# Altium PCB PCB-15_19.PcbDoc (part 3 of 4)
Units mm, origin at the board's own origin, x right, y up, seen from the top; angles counter-clockwise.
Board outline 190 x 150 mm, 6 copper layers (Top Layer, Mid-Layer 1, VCC3V3, GND, Mid-Layer 2, Bottom Layer), stack 1.173 mm thick; 129 components, 396 nets, 1206 pads, 565 vias.
Unrouted connection lines stored in the file: 15.
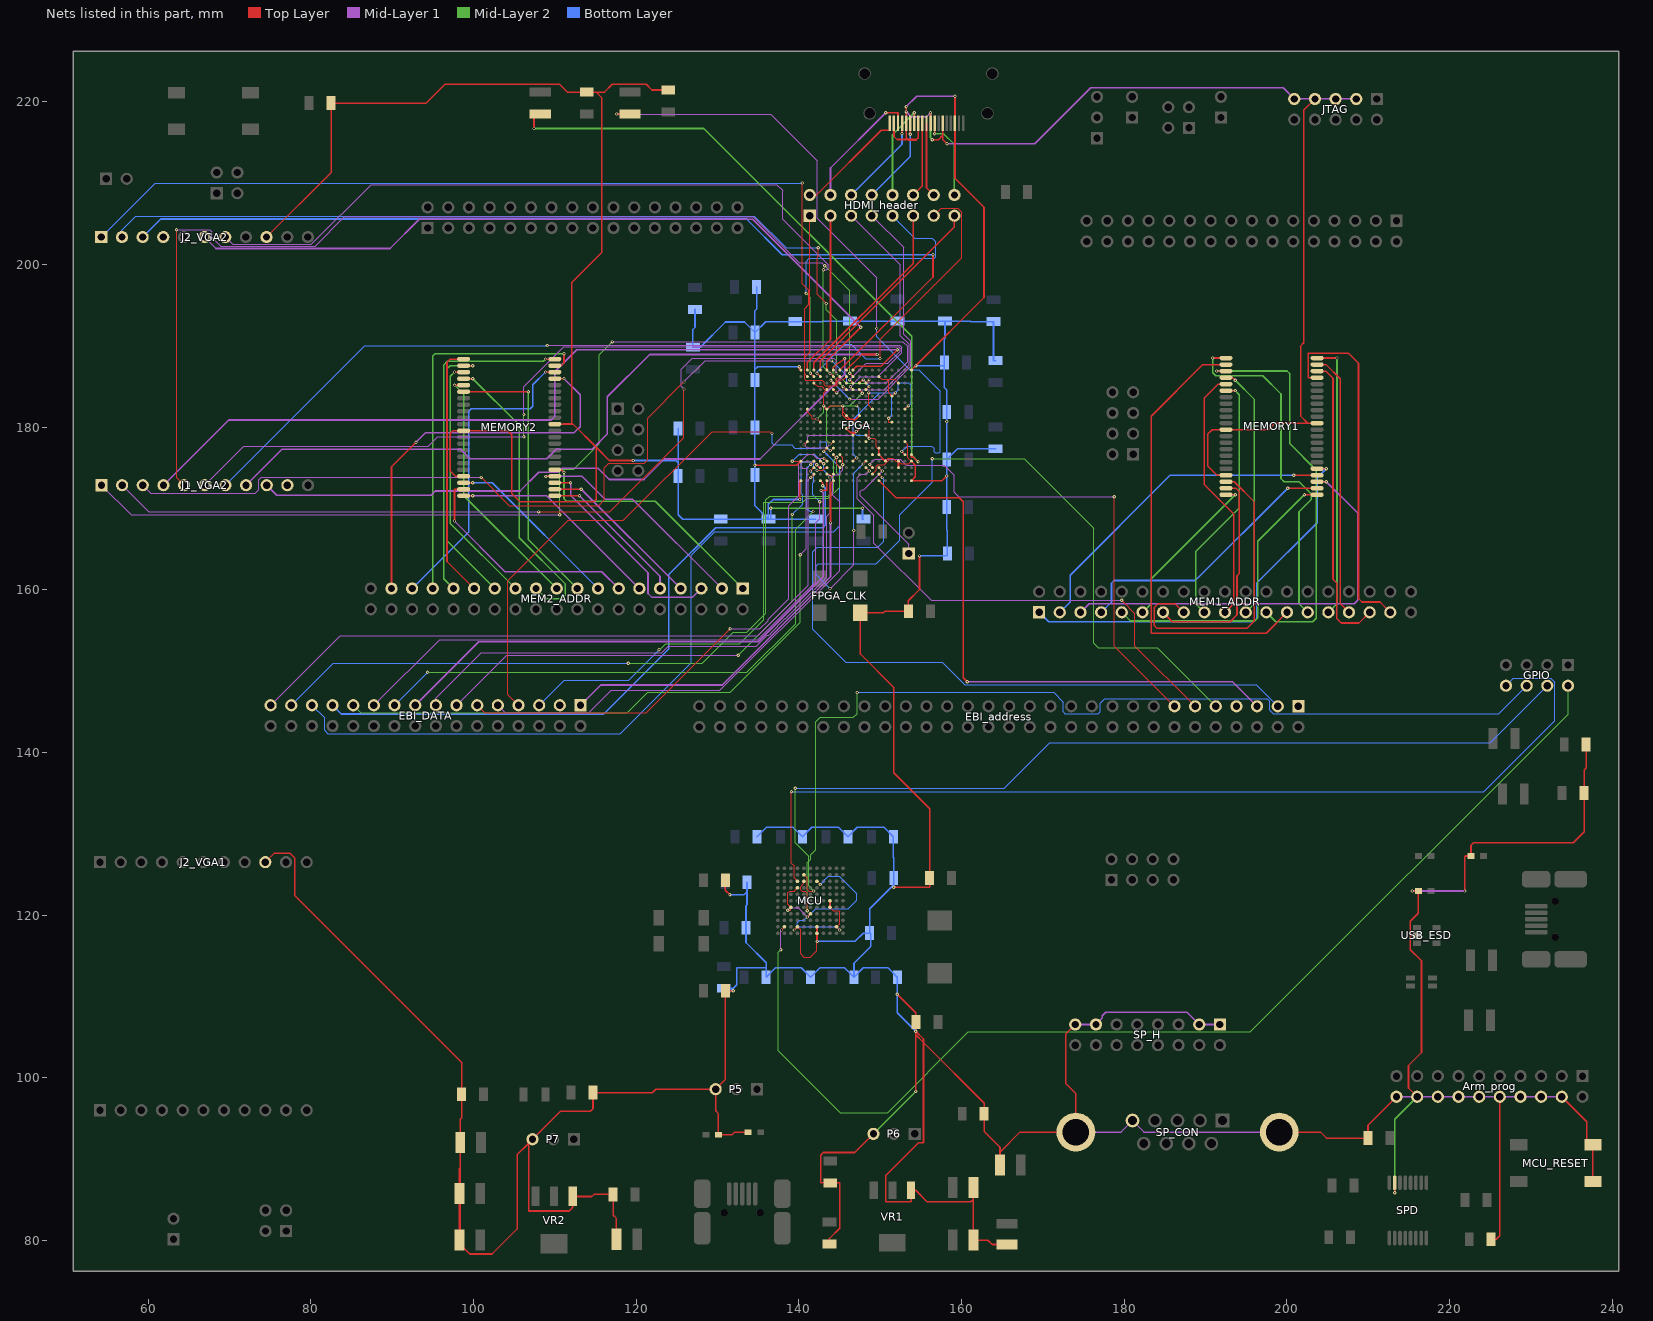
[diagram p7: the nets of this part, all layers, seen from the top]

## Via types
v1: diameter 0.4, hole 0.2, Top Layer to Bottom Layer, 548 vias
v2: diameter 0.4, hole 0.25, Top Layer to Bottom Layer, tented top, 9 vias
v3: diameter 7, hole 5, Top Layer to Bottom Layer, 4 vias
v4: diameter 1.3, hole 0.9, Top Layer to Bottom Layer, 3 vias
v5: diameter 1.5, hole 1.1, Top Layer to Bottom Layer, 1 vias

## Nets (pads, with @x,y where several pads share a name; then routed paths per layer and width w, separated by ;. In a path a pad name is that pad's centre, name@x,y a point inside that pad or via, vN(x,y) a via of type N, cw(c..) or ccw(c..) an arc to the next point about the centre after c; other vN are vias at no path point) (continued)
FPGA.A23: EBI_address.13 FPGA.T12 | length 62.8
  Top Layer w0.1: v1(148.717,175.412) 148.717,175.337 FPGA.T12@149.047,175.007 ; v1(178.791,171.425) 178.791,153.06 EBI_address.13@186.182,145.669
  Mid-Layer 1 w0.1: v1(148.717,175.412) 149.329,176.025 152.473,176.025 153.214,175.284 157.889,175.284 159.118,174.056 159.118,171.968 159.662,171.425 v1(178.791,171.425)
FPGA.A24: EBI_address.11 FPGA.T11 | length 61.4
  Top Layer w0.1: FPGA.T11@148.247,175.007 v1(148.648,174.606) ; v1(179.705,158.699) 181.331,157.074 181.331,153.06 EBI_address.11@188.722,145.669
  Mid-Layer 1 w0.1: v1(148.648,174.606) 148.234,174.193 147.625,174.193 147.18,173.748 147.18,171.19 149.216,169.154 149.216,165.744 156.261,158.699 v1(179.705,158.699)
FPGA.A25: EBI_address.9 FPGA.R11 | length 100
  Top Layer w0.1: v1(147.903,175.463) FPGA.R11@148.247,175.807
  Mid-Layer 1 w0.1: v1(143.84,160.147) 146.761,163.068 v1(146.761,167.284)
  Mid-Layer 2 w0.1: v1(156.413,176.098) 167.742,176.098 176.251,167.589 176.251,153.416 176.784,152.883 184.048,152.883 EBI_address.9@191.262,145.669
  Bottom Layer w0.1: v1(143.84,160.147) 142.138,161.849 142.138,162.966 142.367,163.195 149.53,163.195 152.425,166.091 152.425,169.24 156.413,173.228 v1(156.413,176.098) ; v1(146.761,167.284) 146.761,174.321 v1(147.903,175.463)
FPGA.AD00: EBI_DATA.31 FPGA.U3 | length 86.3
  Top Layer w0.1: v1(141.453,173.812) 141.656,174.015 141.847,174.015 FPGA.U3@141.847,174.207
  Mid-Layer 1 w0.1: EBI_DATA.31@75.057,145.796 83.591,154.33 134.924,154.33 141.173,160.579 141.173,173.533 v1(141.453,173.812)
FPGA.AD01: EBI_DATA.29 FPGA.P6 | length 90.5
  Top Layer w0.1: FPGA.P6@144.247,176.607 v1(144.602,176.251)
  Mid-Layer 2 w0.1: v1(119.024,150.952) 128.118,150.952 131.928,154.762 133.582,154.762 135.941,157.121 135.941,171.044 136.423,171.526 143.637,171.526 144.272,172.161 144.272,175.92 v1(144.602,176.251)
  Bottom Layer w0.1: EBI_DATA.29@77.597,145.796 82.753,150.952 v1(119.024,150.952)
FPGA.AD02: EBI_DATA.27 FPGA.N5 | length 96.1
  Top Layer w0.1: v1(143.053,177.013) FPGA.N5@143.447,177.407
  Bottom Layer w0.1: EBI_DATA.27@80.137,145.796 81.686,144.247 81.686,142.697 82.093,142.291 118.034,142.291 126.746,151.003 126.746,164.264 129.64,167.157 144.323,167.157 145.009,167.843 145.009,175.057 v1(143.053,177.013)
FPGA.AD03: EBI_DATA.25 FPGA.V4 | length 81.7
  Top Layer w0.2: FPGA.V4@142.647,173.407 142.929,173.125 v1(142.929,172.798)
  Bottom Layer w0.2: EBI_DATA.25@82.677,145.796 83.744,144.729 116.014,144.729 124.003,152.718 124.003,161.874 129.769,167.64 142.939,167.64 143.256,167.957 143.256,172.471 v1(142.929,172.798)
FPGA.AD04: EBI_DATA.23 FPGA.T4 | length 83.3
  Top Layer w0.1: v1(142.215,175.362) 142.443,175.133 142.443,175.007 FPGA.T4@142.647,175.007
  Mid-Layer 1 w0.1: v1(140.183,164.313) 140.894,165.024 140.894,173.558 141.046,173.711 141.046,174.899 140.995,174.95 140.493,174.95 140.284,175.158 140.284,175.565 140.487,175.768 141.808,175.768 v1(142.215,175.362)
  Mid-Layer 2 w0.1: EBI_DATA.23@85.217,145.796 86.131,144.882 118.923,144.882 121.437,147.396 131.547,147.396 140.183,156.032 v1(140.183,164.313)
FPGA.AD05: EBI_DATA.21 FPGA.T3 | length 75.6
  Top Layer w0.1: v1(141.427,174.6) 141.44,174.6 FPGA.T3@141.847,175.007
  Mid-Layer 1 w0.1: EBI_DATA.21@87.757,145.796 95.834,153.873 134.927,153.873 142.062,161.009 142.062,168.224 142.57,168.732 v1(142.57,170.815)
  Bottom Layer w0.1: v1(141.427,174.6) 141.808,174.219 141.808,173.228 141.707,173.126 141.707,171.679 v1(142.57,170.815)
FPGA.AD06: EBI_DATA.19 FPGA.R3 | length 75.2
  Top Layer w0.1: v1(141.453,175.412) 141.656,175.616 FPGA.R3@141.847,175.807
  Mid-Layer 2 w0.1: v1(94.361,149.86) 133.608,149.86 139.598,155.851 139.598,167.462 v1(141.757,169.621)
  Bottom Layer w0.1: EBI_DATA.19@90.297,145.796 v1(94.361,149.86) ; v1(141.453,175.412) 140.995,174.955 140.995,169.977 141.351,169.621 v1(141.757,169.621)
FPGA.AD07: EBI_DATA.17 FPGA.V5 | length 69.3
  Top Layer w0.2: v1(142.723,172.212) 143.422,172.212 143.447,172.237 FPGA.V5@143.447,173.407
  Mid-Layer 1 w0.2: EBI_DATA.17@92.837,145.796 100.635,153.594 135.001,153.594 143.002,161.595 143.002,171.933 v1(142.723,172.212)
FPGA.AD08: EBI_DATA.15 FPGA.U5 | length 68.4
  Top Layer w0.1: FPGA.U5@143.447,174.207 143.84,174.207 v1(143.84,173.736)
  Mid-Layer 1 w0.1: EBI_DATA.15@95.377,145.796 95.377,146.685 100.965,152.273 123.165,152.273 123.927,153.035 134.796,153.035 136.142,154.381 136.324,154.381 136.522,154.579 136.522,154.635 138.3,156.413 138.356,156.413 138.554,156.611 138.554,156.667 140.332,158.445 140.388,158.445 143.459,161.517 143.459,169.062 143.84,169.443 v1(143.84,173.736)
FPGA.AD09: EBI_DATA.13 FPGA.T5 | length 68.3
  Top Layer w0.1: v1(142.24,174.677) 142.926,174.677 143.256,175.007 FPGA.T5@143.447,175.007
  Mid-Layer 1 w0.1: EBI_DATA.13@97.917,145.796 104.064,151.943 v1(132.563,151.943)
  Mid-Layer 2 w0.1: v1(132.563,151.943) 139.192,158.572 v1(139.192,169.266)
  Bottom Layer w0.1: v1(139.192,169.266) 140.462,170.536 140.462,171.653 140.284,171.831 140.284,175.565 140.487,175.768 141.681,175.768 141.841,175.608 141.841,175.076 v1(142.24,174.677)
FPGA.AD10: EBI_DATA.11 FPGA.R5 | length 66
  Top Layer w0.1: EBI_DATA.11@100.457,145.796 101.371,144.882 121.234,144.882 v1(131.547,155.194) ; v1(143.105,176.149) FPGA.R5@143.447,175.807
  Mid-Layer 1 w0.1: v1(131.547,155.194) 135.222,155.194 136.22,156.191 136.22,156.364 138.735,158.879 138.735,170.307 139.979,171.552 139.979,175.543 141.094,176.657 141.707,176.657 142.215,176.149 v1(143.105,176.149)
FPGA.AD11: EBI_DATA.9 FPGA.P7 | length 65.1
  Top Layer w0.1: FPGA.P7@145.047,176.607 145.415,176.239 v1(145.415,175.362)
  Mid-Layer 1 w0.1: EBI_DATA.9@102.997,145.796 103.911,144.882 114.148,144.882 116.916,147.65 130.3,147.65 145.009,162.359 145.009,170.815 144.196,171.628 144.196,173.939 144.424,174.168 144.831,174.168 145.415,174.752 v1(145.415,175.362)
FPGA.AD12: EBI_DATA.7 FPGA.N6 | length 66.5
  Top Layer w0.1: EBI_DATA.7@105.537,145.796 104.242,147.091 104.242,161.138 111.633,168.529 118.44,168.529 129.337,179.426 136.5,179.426 v1(136.703,179.222) ; v1(143.866,177.114) 143.954,177.114 FPGA.N6@144.247,177.407
  Bottom Layer w0.1: v1(136.703,179.222) 136.703,178.003 136.906,177.8 139.116,177.8 139.497,177.419 142.494,177.419 142.646,177.571 142.646,178.125 142.697,178.175 143.256,178.175 143.459,177.972 143.459,177.521 v1(143.866,177.114)
FPGA.AD13: EBI_DATA.5 FPGA.T7 | length 61.7
  Top Layer w0.1: v1(144.653,176.276) 144.653,175.401 FPGA.T7@145.047,175.007
  Mid-Layer 2 w0.1: v1(122.809,152.629) 122.885,152.629 123.647,153.391 132.766,153.391 135.687,156.312 135.687,170.713 135.712,170.739 140.462,170.739 140.945,171.221 143.612,171.221 145.003,172.613 145.003,174.041 144.653,174.391 v1(144.653,176.276)
  Bottom Layer w0.1: EBI_DATA.5@108.077,145.796 111.176,148.895 119.075,148.895 v1(122.809,152.629)
FPGA.AD14: EBI_DATA.3 FPGA.R7
FPGA.AD15: EBI_DATA.1 FPGA.V6 | length 49.2
  Top Layer w0.2: v1(143.887,168.22) 143.887,173.047 FPGA.V6@144.247,173.407
  Mid-Layer 1 w0.2: EBI_DATA.1@113.157,145.796 115.646,148.285 130.581,148.285 143.887,161.591 v1(143.887,168.22)
FPGA.CLK_SIG: CLK_JMP.1 FPGA.T13 | length 14.4
  Top Layer w0.1: FPGA.T13@149.847,175.007 150.254,174.6 v1(150.266,174.6)
  Mid-Layer 1 w0.1: v1(150.266,174.6) 147.98,172.314 147.783,172.314 147.58,172.11 147.58,171.559 153.524,165.615 CLK_JMP.1@153.524,164.459
FPGA.CS0: EBI_address.5 FPGA.V13 | length 70.6
  Top Layer w0.2: FPGA.V13@149.847,173.407 151.944,171.31 159.715,171.31 160.223,170.802 160.223,149.187 v1(160.719,148.692)
  Mid-Layer 1 w0.2: v1(160.719,148.692) 193.319,148.692 EBI_address.5@196.342,145.669
FPGA.CS1: EBI_address.7 FPGA.M11
FPGA.REN: EBI_address.1 FPGA.P12
FPGA.WEN: EBI_address.3 FPGA.U13 | length 88.4
  Top Layer w0.1: FPGA.U13@149.847,174.207 v1(150.241,173.813)
  Bottom Layer w0.1: v1(150.241,173.813) 150.464,173.59 150.464,165.983 149.682,165.202 142.24,165.202 141.732,164.694 141.732,155.118 145.765,151.085 157.627,151.085 160.376,148.336 196.215,148.336 EBI_address.3@198.882,145.669
FPGA_LEDS.LED_1: FPGA.P17 R3.1 | length 77.5
  Top Layer w0.1: v1(152.654,177) FPGA.P17@153.047,176.607
  Top Layer w0.2: v1(117.626,218.487) R3.1@119.253,218.487
  Mid-Layer 1 w0.1: v1(117.626,218.487) 136.525,218.487 142.265,212.747 142.265,205.664 149.56,198.369 v1(149.56,192.121)
  Bottom Layer w0.1: v1(149.56,192.121) 149.56,191.105 153.619,187.046 154.762,187.046 157.404,184.404 157.404,176.987 157.282,176.866 156.769,176.866 156.647,176.987 156.647,177.391 156.366,177.673 153.327,177.673 v1(152.654,177)
FPGA_LEDS.LED_2: FPGA.P18 R4.1 | length 76.6
  Top Layer w0.2: v1(107.442,216.713) 107.442,218.487 R4.1@108.204,218.487 ; FPGA.P18@153.847,176.607 153.847,176.327 153.872,176.301 154.102,176.301 v1(154.661,175.743)
  Mid-Layer 2 w0.2: v1(107.442,216.713) 128.321,216.713 153.873,191.16 153.873,176.53 v1(154.661,175.743)
FPGA_VGA-I/O.J1_P2: FPGA.A6 J1_VGA2.9 | length 82.9
  Top Layer w0.2: FPGA.A6@144.247,187.007 144.247,187.325 144.627,187.705 v1(145.657,188.417)
  Mid-Layer 1 w0.2: J1_VGA2.9@74.58,172.86 75.812,171.628 94.793,171.628 95.301,172.136 105.715,172.136 108.026,174.447 110.41,174.447 110.897,174.935 115.311,174.935 116.688,173.558 120.968,173.558 123.482,176.073 135.23,176.073 145.657,186.5 v1(145.657,188.417)
FPGA_VGA-I/O.J1_P3: FPGA.C7 J1_VGA2.10
FPGA_VGA-I/O.J1_P8: FPGA.A8 J1_VGA2.8 | length 92.4
  Top Layer w0.2: FPGA.A8@145.847,187.007 147.765,188.925 v1(149.631,188.925)
  Mid-Layer 1 w0.2: J1_VGA2.8@72.04,172.86 76.447,177.267 98.425,177.267 99.568,176.124 109.017,176.124 110.185,177.292 114.605,177.292 116.459,179.146 116.459,183.718 121.666,188.925 v1(149.631,188.925)
FPGA_VGA-I/O.J1_P9: FPGA.D9 J1_VGA2.7 | length 99.6
  Top Layer w0.1: v1(146.355,184.963) 146.355,184.899 FPGA.D9@146.647,184.607
  Mid-Layer 1 w0.1: v1(109.068,190.017) 109.11,190.059 152.4,190.059 152.671,189.789 152.671,189.131 149.721,186.182 147.574,186.182 v1(146.355,184.963)
  Bottom Layer w0.1: J1_VGA2.7@69.5,172.86 86.657,190.017 v1(109.068,190.017)
FPGA_VGA-I/O.J1_P10: FPGA.C9 J1_VGA2.6 | length 104.8
  Top Layer w0.1: v1(146.253,185.801) FPGA.C9@146.647,185.407
  Mid-Layer 1 w0.1: J1_VGA2.6@66.96,172.86 71.773,177.673 94.437,177.673 95.58,178.816 v1(106.197,178.816) ; v1(106.197,181.559) 106.197,184.963 111.094,189.859 152.298,189.859 152.471,189.687 152.471,189.351 150.96,187.841 148.293,187.841 v1(146.253,185.801)
  Mid-Layer 2 w0.1: v1(106.197,178.816) v1(106.197,181.559)
FPGA_VGA-I/O.J1_P11: FPGA.B9 J1_VGA2.5 | length 131.7
  Top Layer w0.1: v1(63.5,204.267) 63.5,173.78 J1_VGA2.5@64.42,172.86 ; v1(146.253,186.614) 146.253,186.601 FPGA.B9@146.647,186.207
  Mid-Layer 1 w0.1: v1(63.5,204.267) 67.589,204.267 67.843,204.013 67.843,203.327 68.91,202.26 80.56,202.26 84.141,205.842 134.394,205.842 140.038,200.197 142.83,200.197 v1(143.18,199.847)
  Mid-Layer 2 w0.1: v1(143.18,199.847) 146.253,196.774 v1(146.253,186.614)
FPGA_VGA-I/O.J1_P12: FPGA.A9 J1_VGA2.4 | length 106.9
  Top Layer w0.2: FPGA.A9@146.647,187.007 147.127,187.487 150.098,187.487 v1(152.121,189.509)
  Mid-Layer 1 w0.2: J1_VGA2.4@61.88,172.86 69.893,180.873 109.563,180.873 109.982,181.292 109.982,186.792 112.7,189.509 v1(152.121,189.509)
FPGA_VGA-I/O.J1_P13: FPGA.D11 J1_VGA2.3 | length 107.6
  Top Layer w0.1: v1(100.94,173.812) 104.394,170.358 115.418,170.358 116.103,171.044 116.103,175.006 116.637,175.539 120.98,175.539 121.412,175.971 121.412,181.077 v1(125.882,185.547) ; FPGA.D11@148.247,184.607 v1(148.641,185.001)
  Mid-Layer 1 w0.1: J1_VGA2.3@59.34,172.86 60.318,171.882 73.177,171.882 73.609,172.314 73.609,173.533 73.889,173.812 v1(100.94,173.812) ; v1(125.882,185.547) 128.473,188.138 v1(144.069,188.138)
  Bottom Layer w0.1: v1(144.069,188.138) 145.872,186.334 145.872,185.598 146.101,185.369 148.272,185.369 v1(148.641,185.001)
FPGA_VGA-I/O.J1_P14: FPGA.C11 J1_VGA2.2 | length 109.4
  Top Layer w0.1: v1(108.026,169.57) 116.738,169.57 125.882,178.714 v1(125.882,184.683) ; FPGA.C11@148.247,185.407 148.438,185.598 v1(148.641,185.801)
  Mid-Layer 1 w0.1: J1_VGA2.2@56.8,172.86 60.09,169.57 v1(108.026,169.57) ; v1(125.882,184.683) 125.527,185.039 125.527,187.122 126.898,188.493 144.272,188.493 144.577,188.189 v1(144.577,186.639)
  Mid-Layer 2 w0.1: v1(144.577,186.639) 145.847,185.369 148.209,185.369 v1(148.641,185.801)
FPGA_VGA-I/O.J1_P15: FPGA.C10 J1_VGA2.1 | length 128.4
  Top Layer w0.1: FPGA.C10@147.447,185.407 147.841,185.801 v1(147.93,185.801)
  Mid-Layer 1 w0.1: J1_VGA2.1@54.26,172.86 57.905,169.215 v1(110.592,169.215) ; v1(117.069,190.475) 152.806,190.475 153.365,189.916 153.365,188.036 150.774,185.445 148.285,185.445 v1(147.93,185.801)
  Mid-Layer 2 w0.1: v1(110.592,169.215) 110.592,174.549 110.846,174.803 112.315,174.803 115.468,177.956 115.468,188.874 v1(117.069,190.475)
FPGA_VGA-I/O.J2_P0: FPGA.A5 J2_VGA2.6 | length 95.2
  Top Layer w0.2: FPGA.A5@143.447,187.007 143.447,188.13 v1(147.599,192.283)
  Mid-Layer 1 w0.2: J2_VGA2.6@66.94,203.36 68.345,201.955 89.738,201.955 93.32,205.537 134.345,205.537 v1(147.599,192.283)
FPGA_VGA-I/O.J2_P1: FPGA.B6 J2_VGA2.7 | length 98.5
  Top Layer w0.1: v1(143.84,186.614) 144.043,186.411 144.247,186.411 FPGA.B6@144.247,186.207
  Mid-Layer 1 w0.1: J2_VGA2.7@69.48,203.36 70.38,202.46 80.057,202.46 87.401,209.804 137.312,209.804 138.024,209.093 138.024,205.559 143.612,199.971 143.612,199.542 143.408,199.339 v1(143.027,199.339)
  Mid-Layer 2 w0.1: v1(143.027,199.339) 143.027,187.427 v1(143.84,186.614)
FPGA_VGA-I/O.J2_P4: FPGA.A7 J2_VGA2.3 | length 118.8
  Top Layer w0.2: FPGA.A7@145.047,187.007 156.489,198.449 v1(156.489,201.193)
  Bottom Layer w0.2: J2_VGA2.3@59.32,203.36 61.548,205.588 133.579,205.588 137.973,201.193 v1(156.489,201.193)
FPGA_VGA-I/O.J2_P5: FPGA.D8 J2_VGA2.2 | length 108.2
  Top Layer w0.1: v1(142.392,202.057) 142.392,200.99 142.24,200.838 142.24,196.342 v1(143.383,195.199) ; v1(145.44,184.963) 145.797,184.607 FPGA.D8@145.847,184.607
  Mid-Layer 2 w0.1: v1(143.383,195.199) 143.383,194.412 144.653,193.142 144.653,187.833 144.221,187.401 144.221,186.182 v1(145.44,184.963)
  Bottom Layer w0.1: J2_VGA2.2@56.78,203.36 56.78,204.227 58.496,205.943 134.544,205.943 138.43,202.057 v1(142.392,202.057)
FPGA_VGA-I/O.J2_P6: FPGA.C8 J2_VGA2.4
FPGA_VGA-I/O.J2_P7: FPGA.B8 J2_VGA2.1 | length 120.1
  Top Layer w0.1: v1(140.437,210.007) 140.437,197.606 141.249,196.794 141.249,195.095 140.717,194.562 140.717,185.852 140.819,185.75 142.888,185.75 143.117,185.522 143.117,185.203 143.256,185.064 144.704,185.064 144.704,185.623 144.882,185.801 145.441,185.801 FPGA.B8@145.847,186.207
  Bottom Layer w0.1: J2_VGA2.1@54.24,203.36 60.887,210.007 v1(140.437,210.007)
GND: ?.2 ?.5 ?.8 ?.11 ?.14 ?.17 Arm_prog.4 Arm_prog.6 Arm_prog.8 Arm_prog.10 Arm_prog.12 Arm_prog.14 Arm_prog.16 Arm_prog.18 Arm_prog.20 C1.2 C2.1 C3.1 C4.1 C5.1 C6.1 C7.1 C8.1 C9.1 C10.1 C11.1 C12.1 C13.1 C14.1 C15.1 C16.1 C17.1 C18.1 C19.1 C20.2 C21.1 C22.1 C23.1 C24.1 C25.2 C27.1 C28.1 C29.1 C30.1 C33.1 C35.1 C36.2 C37.2 C38.1 C39.1 C40.2 C41.2 C42.2 C43.1 C44.2 C45.2 C46.1 C47.1 C48.2 C49.2 C50.1 C51.1 C52.1 C53.1 C54.2 C55.2 C56.2 C57.1 C58.1 C59.2 C60.2 C61.1 D1.2 D2.2 D3.2 D4.2 D5.2 D6.2 FPGA.A1 FPGA.A18 FPGA.B7 FPGA.B13 FPGA.C3 FPGA.C16 FPGA.D5 FPGA.D10 FPGA.E15 FPGA.G2 FPGA.G5 FPGA.G12 FPGA.G17 FPGA.H8 FPGA.H10 FPGA.J4 FPGA.J9 FPGA.J11 FPGA.J15 FPGA.K8 FPGA.K10 FPGA.L9 FPGA.L11 FPGA.M2 FPGA.M6 FPGA.M17 FPGA.N13 FPGA.P13 FPGA.R1 FPGA.R4 FPGA.R9 FPGA.R14 FPGA.R16 FPGA.R18 FPGA.T16 FPGA.U6 FPGA.U12 FPGA.V1 FPGA.V18 FPGA_CLK.2 J2_VGA1.9 J2_VGA2.9 JTAG.3 JTAG.5 JTAG.7 JTAG.9 L3.1 L4.1 L5.1 L6.1 MCU.C7 MCU.D4 MCU.F9 MCU.G3 MCU.G9 MCU.H6 MCU.K4 MCU.K7 MCU.K10 MCU.L7 MCU_RESET.2 MCU_RESET.4 MEMORY1.12 MEMORY1.34 MEMORY1.41 MEMORY2.12 MEMORY2.34 MEMORY2.41 P5.3 P6.3 P7.3 R7.2 SP_CON.5 SP_CON.10 SP_CON.11 SP_H.1 SP_H.3 SP_H.13 SP_H.15 SPD.15 USB_ESD.2 VR1.1 VR2.1 | length 1345.4
  Top Layer w0.1: v1(138.633,120.599) 139.029,120.599 MCU.G3@139.029,120.954 138.629,121.354 138.629,122.733 138.858,122.961 139.436,122.961 MCU.D4@139.829,123.354 ; v1(139.192,175.807) FPGA.R1@140.247,175.807 ; v1(139.421,118.161) 139.436,118.161 MCU.K4@139.829,118.554 ; MCU.K4@139.802,118.542 MCU.K4@139.829,118.554 ; v1(140.64,177.8) FPGA.M2@141.047,178.207 ; v1(141.021,119.761) 141.036,119.761 v1@141.046,119.771 ; v1(141.046,119.761) v1@141.046,119.771 ; FPGA.G2@141.047,182.207 141.047,181.877 141.503,181.421 141.58,181 v1(142.24,181) 142.254,181 FPGA.J4@142.647,180.607 ; MCU.H6@141.429,120.154 v1@141.046,119.771 ; FPGA.C3@141.847,185.407 142.002,185.252 142.046,185.252 142.297,185.001 142.793,185.001 143.187,184.607 FPGA.D5@143.447,184.607 ; MCU.K7@142.229,118.554 MCU.L7@142.229,117.754 142.229,115.635 141.427,114.833 140.614,114.833 140.208,115.24 140.208,118.175 MCU.K4@139.829,118.554 ; MCU.C7@142.229,124.154 142.621,123.762 v1(142.621,123.749) ; FPGA.R4@142.647,175.807 142.965,175.489 v1(143.053,175.489) ; MCU.G9@143.829,120.954 144.235,120.548 144.882,120.548 145.009,120.421 145.009,118.934 MCU.K10@144.629,118.554 145.022,118.161 v1(145.034,118.161) ; v1(143.84,173.896) 143.936,173.896 FPGA.U6@144.247,174.207 ; v1(143.84,177.927) 143.967,177.927 FPGA.M6@144.247,178.207 ; FPGA.B7@145.047,186.207 144.895,186.055 144.755,186.055 144.628,185.928 144.628,185.318 144.374,185.064 143.904,185.064 FPGA.D5@143.447,184.607 ; v1(145.39,182.601) v1@145.39,182.524 ; FPGA.K8@145.847,179.807 FPGA.J9@146.647,180.607 ; FPGA.H8@145.847,181.407 145.44,181.814 145.44,182.474 v1@145.39,182.524 ; FPGA.R9@146.647,175.807 147.04,176.2 v1(147.117,176.2) ; FPGA.L9@146.647,179.007 146.647,179.222 146.672,179.248 146.876,179.451 v1(147.066,179.451) ; FPGA.K10@147.447,179.807 FPGA.J11@148.247,180.607 148.641,180.213 v1(148.641,178.613) ; FPGA.H10@147.447,181.407 147.015,180.975 145.898,180.975 145.39,181.483 v1@145.39,182.524 ; FPGA.D10@147.447,184.607 147.803,184.251 v1(147.803,184.15) ; FPGA.L11@148.247,179.007 148.412,179.007 148.412,178.841 v1(148.641,178.613) ; v1(148.59,184.201) 148.59,182.664 FPGA.G12@149.047,182.207 ; FPGA.U12@149.047,174.207 149.504,174.664 149.504,175.158 149.708,175.362 150.495,175.362 151.282,176.149 ; FPGA.N13@149.847,177.407 149.657,177.407 149.504,177.559 149.504,178.41 149.301,178.613 v1(148.641,178.613) ; FPGA.B13@149.847,186.207 150.202,185.852 150.774,185.852 ; FPGA.R14@150.647,175.807 150.989,176.149 151.282,176.149 ; v1(151.054,181.077) 151.054,180.607 FPGA.J15@151.447,180.607 ; v1(151.841,184.201) FPGA.E15@151.447,183.807 151.054,184.2 151.054,185.572 150.774,185.852 ; FPGA.C16@152.247,185.407 151.802,185.852 150.774,185.852 ; FPGA.M17@153.047,178.207 153.416,177.838 153.416,176.238 FPGA.R18@153.847,175.807 153.503,175.463 152.591,175.463 FPGA.R16@152.247,175.807 151.917,175.807 151.575,176.149 151.282,176.149 ; FPGA.G17@153.047,182.207 v1(153.441,182.601) ; v1(143.053,182.601) 143.053,184.213 ; v1(143.053,182.601) FPGA.G5@143.447,182.207 ; v1(143.053,182.601) 143.047,182.607 143.047,184.207 143.053,184.213 ; v1(143.053,182.601) 143.256,182.207 FPGA.G5@143.447,182.207 ; 143.053,184.213 FPGA.D5@143.447,184.607 ; FPGA.G5@143.447,182.207 143.847,182.607 145.307,182.607 v1@145.39,182.524
  Top Layer w0.2: J2_VGA1.9@74.41,126.51 75.484,127.584 77.47,127.584 78.003,127.051 78.003,122.428 98.55,101.881 C30.1@98.55,97.97 98.55,95.059 98.385,94.894 C61.1@98.385,92.02 98.385,88.934 ; J2_VGA2.9@74.56,203.36 82.503,211.303 R7.2@82.503,219.837 94.183,219.837 96.495,222.148 110.57,222.148 111.531,221.187 D6.2@113.919,221.187 115.087,221.187 ; C12.1@98.275,80.04 C13.1@98.275,85.77 98.275,88.824 98.385,88.934 ; MEMORY2.41@98.794,173.959 97.796,173.959 97.155,174.6 97.155,179.242 97.472,179.559 MEMORY2.34@98.794,179.559 104.21,179.559 104.699,179.07 104.699,171.831 105.727,170.802 114.757,170.802 115.087,171.132 115.087,177.514 ; MEMORY2.12@109.994,180.359 111.023,180.359 111.04,180.377 112.102,180.377 ; C11.1@117.575,80.15 117.575,82.702 117.18,83.097 C29.1@117.18,85.66 114.808,85.66 114.554,85.406 VR2.1@112.206,85.406 112.206,84.063 111.76,83.617 106.807,83.617 106.782,83.642 P7.3@106.782,91.962 ; v1(119.634,175.895) 116.707,175.895 115.087,177.514 ; D5.2@123.952,221.441 121.942,221.441 121.234,222.148 117.065,222.148 116.103,221.187 115.087,221.187 ; C22.1@130.968,110.705 C22.1@130.968,110.693 ; C21.1@130.968,124.294 130.968,123.063 v1(131.527,122.504) ; v1(131.928,110.693) C22.1@130.968,110.693 ; L5.1@133.765,93.29 132.085,93.29 131.775,92.98 L6.1@130.115,92.98 130.115,95.606 129.77,95.951 P5.3@129.77,98.6 ; v1(134.601,175.311) 139.751,175.311 FPGA.R1@140.247,175.807 ; v1(140.056,187.427) 140.056,187.198 FPGA.A1@140.247,187.007 ; v1(140.106,171.094) 140.106,173.266 FPGA.V1@140.247,173.407 ; MCU.K7@142.229,118.554 MCU.L7@142.229,117.754 142.265,117.718 v1(142.265,116.764) ; C28.1@143.76,79.54 143.76,80.235 145.034,81.509 145.034,87.045 145.009,87.07 C27.1@143.86,87.07 142.697,87.095 142.697,90.487 143.015,90.805 146.875,90.805 P6.3@149.17,93.1 ; MCU.G9@143.829,120.954 MCU.F9@143.829,121.754 ; FPGA.K8@145.847,179.807 146.327,179.327 146.619,179.327 146.647,179.299 146.647,179.222 ; FPGA.H8@145.847,181.407 146.327,180.927 146.619,180.927 146.647,180.899 146.647,180.823 ; FPGA.L9@146.647,179.007 146.647,179.222 ; FPGA.J9@146.647,180.607 146.647,180.823 ; FPGA.K10@147.447,179.807 146.888,179.248 146.672,179.248 146.647,179.222 ; FPGA.H10@147.447,181.407 146.888,180.848 146.672,180.848 146.647,180.823 ; FPGA.N13@149.847,177.407 FPGA.P13@149.847,176.607 149.847,176.595 150.635,175.807 FPGA.R14@150.647,175.807 ; v1(151.669,123.419) 156.065,123.419 156.09,123.444 C24.1@156.09,124.57 156.09,133.089 151.689,137.49 151.689,147.98 147.574,152.095 FPGA_CLK.2@147.574,157.174 150.419,157.174 150.598,157.353 C25.2@153.463,157.353 153.463,158.648 154.838,160.024 v1(154.838,164.16) ; ?.2@151.695,217.367 151.695,215.738 152.082,215.35 153.427,215.35 ; v1(152.11,110.275) 154.39,107.995 C23.1@154.39,106.87 v1@154.39,105.706 ; FPGA.T16@152.247,175.007 FPGA.R16@152.247,175.807 ; v1(153.187,219.38) 153.195,219.372 v1(153.195,218.752) ?.5@153.195,217.367 153.195,215.582 153.427,215.35 ; VR1.1@153.811,86.156 153.811,84.811 153.773,84.772 150.724,84.772 150.698,84.798 150.698,87.986 154.711,91.999 155.296,91.999 155.321,92.024 155.321,104.345 ; VR1.1@153.811,86.156 154.381,86.157 155.768,84.77 161.145,84.77 161.465,85.09 ; FPGA.R18@153.847,175.807 154.33,175.324 154.33,173.89 FPGA.V18@153.847,173.407 157.605,173.407 v1(158.19,173.992) ; FPGA.A18@153.847,187.007 v1(154.394,187.554) 162.763,195.923 162.763,207.035 159.195,210.604 ?.17@159.195,217.367 v1(159.195,220.675) ; v1(154.381,105.715) v1@154.39,105.706 ; v1(154.39,98.32) 154.39,105.276 ; ?.8@154.695,217.367 154.695,215.582 154.463,215.35 ; ?.11@156.195,217.367 v1(156.195,218.644) ; v1(156.413,215.341) 157.162,215.341 157.695,215.874 ; ?.14@157.695,217.367 157.695,215.874 ; v1(158.215,214.833) 157.695,215.353 157.695,215.874 ; C5.1@161.465,86.51 161.465,85.09 ; C6.1@164.735,89.28 164.735,90.856 ; C7.1@165.6,79.505 163.781,79.505 163.246,80.04 C4.1@161.465,80.04 161.465,85.09 ; SP_H.15@173.99,106.553 172.822,105.385 172.822,99.289 174.068,98.042 SP_CON.11@174.068,93.32 167.199,93.32 164.735,90.856 ; MEMORY1.41@192.52,174.086 191.42,174.086 190.254,175.252 190.254,179.122 190.817,179.686 MEMORY1.34@192.52,179.686 197.714,179.686 198.514,180.486 202.565,180.486 ; SP_CON.10@199.058,93.32 204.14,93.32 204.877,92.583 C35.1@209.978,92.583 209.978,94.154 Arm_prog.20@213.487,97.663 ; JTAG.7@203.454,220.345 202.082,218.973 202.082,190.361 201.69,189.969 201.69,181.361 202.565,180.486 ; MEMORY1.12@203.72,180.486 202.565,180.486 ; v1(213.258,85.877) SPD.15@213.259,87.093 ; v1(215.417,122.961) 215.426,122.953 L3.1@216.163,122.953 216.163,120.218 215.189,119.244 215.189,117.517 215.214,117.492 ; USB_ESD.2@215.992,117.492 215.214,117.492 ; Arm_prog.18@216.027,97.663 214.96,98.73 214.96,101.498 216.56,103.099 216.56,114.376 215.189,115.748 215.189,117.467 215.214,117.492 ; v1(221.894,122.961) 221.894,127.246 221.92,127.271 L4.1@222.64,127.271 222.64,128.588 222.957,128.905 235.204,128.905 236.554,130.255 D4.2@236.554,135.001 236.554,137.846 236.808,138.1 D3.2@236.808,140.97 ; C33.1@225.124,80.137 225.742,80.137 226.187,80.581 Arm_prog.10@226.187,97.663 ; Arm_prog.4@233.807,97.663 236.88,94.59 236.88,91.749 MCU_RESET.4@237.617,91.749 MCU_RESET.2@237.617,87.249 ; 98.385,88.934 98.385,79.491 99.543,78.334 102.286,78.334 105.359,81.407 105.359,90.539 P7.3@106.782,91.962 ; P7.3@106.782,91.962 P7.3@107.26,92.44 110.705,95.885 114.373,95.885 114.69,96.203 D2.2@114.69,98.17 121.996,98.17 122.426,98.6 P5.3@129.77,98.6 ; 112.102,180.377 112.225,180.377 115.087,177.514 ; 112.102,180.377 112.102,197.802 115.748,201.447 115.748,220.527 115.087,221.187 ; P5.3@129.77,98.6 130.968,99.798 C22.1@130.968,110.693 ; 153.427,215.35 153.513,215.265 154.377,215.265 154.463,215.35 ; 153.427,215.35 154.463,215.35 ; 154.39,105.276 v1@154.39,105.706 ; 154.39,105.276 155.321,104.345 ; v1@154.39,105.706 155.321,104.775 155.321,104.345 ; 155.321,104.345 162.79,96.876 D1.2@162.79,95.58 162.79,93.385 164.735,91.44 164.735,90.856
  Mid-Layer 1 w0.1: v1(138.633,120.599) 138.938,120.904 139.903,120.904 v1(141.046,119.761) ; v1(143.84,177.927) 143.358,177.444 140.995,177.444 v1(140.64,177.8) 141.097,178.257 141.097,178.816 141.3,179.019 146.634,179.019 v1(147.066,179.451)
  Mid-Layer 1 w0.2: v1(153.187,219.38) 154.483,220.675 v1(159.195,220.675) ; v1(153.195,218.752) 153.811,218.135 155.686,218.135 v1(156.195,218.644) ; v1(158.215,214.833) 169.012,214.833 175.895,221.717 199.542,221.717 JTAG.9@200.914,220.345 JTAG.7@203.454,220.345 JTAG.5@205.994,220.345 JTAG.3@208.534,220.345 ; SP_H.15@173.99,106.553 SP_H.13@176.53,106.553 177.315,107.338 177.315,107.632 177.734,108.052 187.731,108.052 SP_H.3@189.23,106.553 SP_H.1@191.77,106.553 ; SP_CON.11@174.068,93.32 179.603,93.32 SP_CON.5@181.023,94.74 182.443,93.32 SP_CON.10@199.058,93.32 ; Arm_prog.20@213.487,97.663 Arm_prog.18@216.027,97.663 Arm_prog.16@218.567,97.663 Arm_prog.14@221.107,97.663 Arm_prog.12@223.647,97.663 Arm_prog.10@226.187,97.663 Arm_prog.8@228.727,97.663 Arm_prog.6@231.267,97.663 Arm_prog.4@233.807,97.663 ; v1(215.417,122.961) v1(221.894,122.961)
  Mid-Layer 2 w0.1: v1(142.24,181) 143.053,181.813 v1(143.053,182.601) ; v1(143.84,177.927) 143.459,178.308 143.459,182.107 143.953,182.601 v1(145.39,182.601) 146.253,182.601 ; v1(147.142,182.601) 146.253,182.601 ; v1(147.803,184.15) 146.253,182.601
  Mid-Layer 2 w0.2: v1(136.55,170.028) v1(147.828,170.028) ; P6.3@149.17,93.1 v1(154.39,98.32) ; v1(156.195,218.644) 156.185,218.634 156.185,215.57 v1(156.413,215.341) ; v1(213.258,85.877) 213.258,94.894 Arm_prog.18@216.027,97.663
  Bottom Layer w0.1: v1(139.192,175.807) 140.042,176.657 141.884,176.657 v1(143.053,175.489) 143.053,174.684 v1(143.84,173.896) ; v1(139.421,118.161) 139.802,118.542 ; v1(141.021,119.761) 140.614,119.355 140.106,119.355 139.827,119.075 139.827,118.567 139.802,118.542 ; v1(141.046,119.761) 142.062,120.777 146.075,120.777 147.117,121.818 147.117,122.631 144.983,124.765 143.637,124.765 v1(142.621,123.749) ; v1(145.034,118.161) 144.653,118.542 139.802,118.542 ; v1(147.066,179.451) 146.875,179.26 ; v1(147.117,176.2) 146.685,176.632 146.685,179.07 146.875,179.26 ; v1(147.142,182.601) 147.396,182.347 147.396,181.661 ; v1(148.59,184.201) 149.936,184.201 ; v1(148.641,178.613) 148.234,179.019 147.117,179.019 146.875,179.26 ; v1(151.054,181.077) 151.409,181.432 151.409,183.769 v1(151.841,184.201) ; v1(153.441,182.601) 153.797,182.956 153.797,185.115 153.467,185.445 152.375,185.445 152.248,185.318 152.248,184.607 v1(151.841,184.201) ; 146.685,180.848 146.685,180.95 147.396,181.661 ; 146.685,180.848 146.685,179.451 146.875,179.26 ; 146.685,180.848 147.396,181.559 147.396,181.661 ; 147.396,181.661 149.936,184.201 ; 149.936,184.201 v1(151.841,184.201)
  Bottom Layer w0.2: v1(119.634,175.895) 124.852,175.895 125.17,175.577 ; C44.2@125.17,179.826 125.17,175.577 ; C46.1@127.235,194.478 127.235,192.253 126.981,191.999 C45.2@126.981,189.812 127.887,189.812 130.988,192.913 133.325,192.913 C36.2@134.601,191.637 ; C17.1@130.761,111.006 131.615,111.006 ; v1(131.527,122.504) 133.267,122.504 133.635,122.872 ; v1(131.928,110.693) 131.615,111.006 ; C20.2@133.635,124.04 133.635,122.872 ; C52.1@134.808,197.225 134.808,194.517 134.601,194.31 C36.2@134.601,191.637 ; C10.1@134.858,129.628 136.015,130.785 139.289,130.785 C14.1@140.446,129.628 141.603,130.785 144.877,130.785 C16.1@146.034,129.628 147.191,130.785 150.465,130.785 C15.1@151.622,129.628 151.622,127.098 151.669,127.051 C19.1@151.669,124.548 C19.1@151.669,123.749 ; v1(136.55,170.028) C59.2@136.55,168.683 ; v1(140.056,187.427) 134.938,187.427 134.601,187.09 ; v1(140.106,171.094) 136.843,171.094 136.252,170.504 C59.2@136.252,168.683 ; C58.1@142.094,168.683 C59.2@136.55,168.683 ; v1(142.265,116.764) 146.889,116.764 147.904,117.779 C1.2@148.715,117.779 ; v1(147.828,170.028) 147.828,168.683 C57.1@147.936,168.683 ; v1(151.669,123.419) C19.1@151.669,123.749 ; v1(154.381,105.715) 152.11,107.986 v1(152.11,110.275) C2.1@152.11,112.356 150.953,113.513 147.933,113.513 C3.1@146.776,112.356 ; v1(154.394,187.554) C53.1@157.889,187.554 ; v1(154.838,164.16) 158.27,164.16 C47.1@158.27,164.459 158.27,167.259 158.19,167.339 C56.2@158.19,170.174 v1(158.19,173.992) C55.2@158.19,176.016 ; C41.2@164.192,177.333 159.507,177.333 C55.2@158.19,176.016 ; C42.2@164.192,188.161 163.938,188.161 C43.1@163.938,192.954 161.175,192.954 161.095,193.034 C48.2@157.969,193.034 ; 125.17,175.577 C40.2@125.17,173.984 125.17,169.227 125.714,168.683 C60.2@130.41,168.683 C59.2@136.252,168.683 ; 131.615,111.006 131.948,111.006 132.385,111.442 132.385,113.462 132.436,113.513 135.956,113.513 135.981,113.487 ; 133.635,122.872 133.635,121.285 133.508,121.158 C18.1@133.508,118.452 133.508,116.621 135.981,114.148 135.981,113.487 ; 134.601,187.09 C36.2@134.601,191.637 ; 134.601,187.09 C37.2@134.601,185.795 C38.1@134.601,179.953 v1(134.601,175.311) C39.1@134.601,174.111 134.601,170.334 C59.2@136.252,168.683 ; C36.2@134.601,191.637 135.918,192.954 C51.1@139.554,192.954 142.875,192.954 142.955,193.034 C50.1@146.285,193.034 C49.2@152.127,193.034 C48.2@157.969,193.034 ; 135.981,113.487 C9.1@135.981,112.356 137.138,113.513 140.285,113.513 C8.1@141.442,112.356 142.599,113.513 145.619,113.513 C3.1@146.776,112.356 ; C59.2@136.252,168.683 C59.2@136.55,168.683 ; C3.1@146.776,112.356 146.776,114.097 148.861,116.182 148.861,117.779 C1.2@148.715,117.779 ; C1.2@148.715,117.779 C1.2@148.715,117.817 148.715,120.795 C19.1@151.669,123.749 ; C53.1@157.889,187.554 C53.1@157.889,187.954 157.889,190.851 157.969,190.931 C48.2@157.969,193.034 ; C53.1@157.889,187.554 157.889,184.861 158.19,184.56 C54.2@158.19,181.858 v1(158.19,180.681) C55.2@158.19,176.016
GPIO.GPIO0: GPIO.2 MCU.K2 | length 139.6
  Top Layer w0.1: v1(137.873,118.161) 138.229,118.516 MCU.K2@138.229,118.554
  Mid-Layer 1 w0.1: v1(137.795,115.748) 137.795,118.082 v1(137.873,118.161)
  Mid-Layer 2 w0.1: v1(137.795,115.748) 137.49,115.443 137.49,103.302 145.085,95.707 150.927,95.707 160.858,105.639 195.504,105.639 234.569,144.704 GPIO.2@234.569,148.209
GPIO.GPIO1: GPIO.4 MCU.B5 | length 114.1
  Top Layer w0.1: MCU.B5@140.629,124.954 141.021,124.562 141.021,123.165 141.224,122.961 v1(141.834,122.961)
  Mid-Layer 2 w0.1: v1(139.573,135.611) 139.573,128.88 141.199,127.254 141.199,123.596 v1(141.834,122.961)
  Bottom Layer w0.1: v1(139.573,135.611) 165.278,135.611 170.866,141.199 225.019,141.199 GPIO.4@232.029,148.209
GPIO.GPIO2: GPIO.6 MCU.C5 | length 124.3
  Top Layer w0.1: MCU.C5@140.629,124.154 140.629,123.89 140.233,123.495 140.233,123.139 140.444,122.929 140.784,122.929 141.046,122.667 v1(141.046,120.548)
  Mid-Layer 2 w0.1: v1(141.046,120.548) 141.046,126.43 141.479,126.863 141.479,127.408 142.088,128.016 142.088,143.789 142.621,144.323 146.71,144.323 147.168,144.78 v1(147.168,147.371)
  Bottom Layer w0.1: v1(147.168,147.371) 171.323,147.371 172.517,146.177 172.517,144.972 172.72,144.769 176.784,144.769 177.038,145.023 177.038,146.025 177.597,146.583 197.612,146.583 197.917,146.279 197.917,145.161 198.323,144.755 226.035,144.755 GPIO.6@229.489,148.209
GPIO.GPIO3: GPIO.8 MCU.C4 | length 120.1
  Top Layer w0.1: v1(139.09,135.153) 139.09,126.39 139.421,126.06 139.421,124.562 MCU.C4@139.829,124.154
  Bottom Layer w0.1: v1(139.09,135.153) 224.231,135.153 232.943,143.866 232.943,148.641 232.461,149.123 227.863,149.123 GPIO.8@226.949,148.209
HDMI.CLK+: FPGA.B4 HDMI_header.13 | length 36.9
  Top Layer w0.1: v1(142.24,186.614) FPGA.B4@142.647,186.207 ; v1(149.987,188.417) 149.987,190.779 160.045,200.838 160.045,206.426 159.563,206.908 157.505,206.908 HDMI_header.13@156.591,205.994
  Bottom Layer w0.1: v1(142.24,186.614) 142.24,186.817 145.618,190.195 146.431,190.195 148.209,188.417 v1(149.987,188.417)
HDMI.CLK-: FPGA.A4 HDMI_header.15 | length 25.8
  Top Layer w0.2: FPGA.A4@142.647,187.007 142.647,188.135 159.131,204.619 HDMI_header.15@159.131,205.994
HDMI.D0+: FPGA.B3 HDMI_header.9 | length 39.2
  Top Layer w0.1: v1(141.427,186.627) FPGA.B3@141.847,186.207
  Mid-Layer 2 w0.1: v1(140.894,196.444) 141.427,195.91 v1(141.427,186.627)
  Bottom Layer w0.1: v1(140.894,196.444) 140.894,200.355 141.3,200.762 156.642,200.762 156.845,200.965 156.845,202.794 156.413,203.225 154.28,203.225 HDMI_header.9@151.511,205.994
HDMI.D0-: FPGA.A3 HDMI_header.11 | length 24
  Top Layer w0.2: FPGA.A3@141.847,187.007 141.847,187.905 154.051,200.109 HDMI_header.11@154.051,205.994
HDMI.D1+: FPGA.D6 HDMI_header.5 | length 32.2
  Top Layer w0.1: FPGA.D6@144.247,184.607 v1(144.653,184.201)
  Mid-Layer 1 w0.1: v1(144.653,184.201) 145.06,184.607 150.495,184.607 153.568,187.681 153.568,190.17 152.491,191.247 152.491,199.934 HDMI_header.5@146.431,205.994
HDMI.D1-: FPGA.C6 HDMI_header.7 | length 33.4
  Top Layer w0.1: v1(143.942,185.75) 143.942,185.712 FPGA.C6@144.247,185.407
  Mid-Layer 1 w0.1: v1(146.253,183.439) 149.736,183.439 153.772,187.474 153.772,190.551 152.883,191.44 152.883,202.082 HDMI_header.7@148.971,205.994
  Bottom Layer w0.1: v1(143.942,185.75) v1(146.253,183.439)
HDMI.D2+: FPGA.B2 HDMI_header.1 | length 20.2
  Top Layer w0.1: FPGA.B2@141.047,186.207 140.716,186.538 140.716,188.595 141.351,189.23 HDMI_header.1@141.351,205.994
HDMI.D2-: FPGA.A2 HDMI_header.3 | length 20.2
  Top Layer w0.2: FPGA.A2@141.047,187.007 141.047,187.929 143.891,190.773 HDMI_header.3@143.891,205.994
I_HDMI.CLK+: ?.10 HDMI_header.14 | length 9.2
  Top Layer w0.2: ?.10@155.695,217.367 155.695,209.43 HDMI_header.14@156.591,208.534
I_HDMI.CLK-: ?.12 HDMI_header.16 | length 10.5
  Top Layer w0.2: v1(156.695,216.078) ?.12@156.695,217.367
  Mid-Layer 2 w0.2: v1(156.695,216.078) 157.797,216.078 159.131,214.744 HDMI_header.16@159.131,208.534
I_HDMI.D0+: ?.7 HDMI_header.10 | length 12.5
  Top Layer w0.2: ?.7@154.195,217.367 154.195,218.635 v1(154.203,218.643)
  Mid-Layer 2 w0.2: HDMI_header.10@151.511,208.534 151.511,215.951 v1(154.203,218.643)
I_HDMI.D0-: ?.9 HDMI_header.12 | length 9.3
  Top Layer w0.2: HDMI_header.12@154.051,208.534 155.195,209.678 ?.9@155.195,217.367
I_HDMI.D1+: ?.4 HDMI_header.6 | length 11.4
  Top Layer w0.2: v1(152.679,216.078) 152.695,216.093 ?.4@152.695,217.367
  Bottom Layer w0.2: HDMI_header.6@146.431,208.534 152.679,214.782 v1(152.679,216.078)
I_HDMI.D1-: ?.6 HDMI_header.8 | length 10.8
  Top Layer w0.2: v1(153.695,216.002) ?.6@153.695,217.367
  Bottom Layer w0.2: HDMI_header.8@148.971,208.534 153.695,213.258 v1(153.695,216.002)
I_HDMI.D2+: ?.1 HDMI_header.2 | length 14
  Top Layer w0.2: HDMI_header.2@141.351,208.534 142.164,208.534 150.139,216.51 151.195,216.51 ?.1@151.195,217.367
I_HDMI.D2-: ?.3 HDMI_header.4 | length 15.7
  Top Layer w0.2: v1(150.673,218.643) 152.17,218.643 152.195,218.618 ?.3@152.195,217.367
  Mid-Layer 1 w0.2: HDMI_header.4@143.891,208.534 143.891,211.861 v1(150.673,218.643)
I_MEMORY.ADDR0_Data_mem1: MEM1_ADDR.1 MEMORY1.5 | length 50.5
  Top Layer w0.2: MEMORY1.5@203.72,174.886 v1(204.851,174.886)
  Bottom Layer w0.2: MEM1_ADDR.1@169.545,157.226 170.713,156.058 195.897,156.058 196.317,156.477 196.317,160.833 203.733,168.25 203.733,173.768 v1(204.851,174.886)
I_MEMORY.ADDR0_Data_mem2: MEM2_ADDR.1 MEMORY2.5 | length 31.1
  Top Layer w0.2: MEMORY2.5@109.994,174.759 110.8,174.759 v1(111.125,174.434)
  Mid-Layer 2 w0.2: v1(111.125,174.434) 111.125,171.196 111.442,170.879 122.364,170.879 MEM2_ADDR.1@133.096,160.147
I_MEMORY.ADDR1_Data_mem1: MEM1_ADDR.3 MEMORY1.4 | length 40.6
  Top Layer w0.2: v1(200.863,174.086) MEMORY1.4@203.72,174.086
  Bottom Layer w0.2: MEM1_ADDR.3@172.085,157.226 173.355,158.496 173.355,161.798 185.643,174.086 v1(200.863,174.086)
I_MEMORY.ADDR1_Data_mem2: MEM2_ADDR.3 MEMORY2.4 | length 28.5
  Top Layer w0.2: v1(108.895,173.934) 108.919,173.959 MEMORY2.4@109.994,173.959
  Mid-Layer 1 w0.2: v1(108.895,173.934) 113.39,173.934 116.18,171.145 119.558,171.145 MEM2_ADDR.3@130.556,160.147
I_MEMORY.ADDR2_Data_mem1: MEM1_ADDR.5 MEMORY1.3 | length 52
  Top Layer w0.2: MEMORY1.3@203.72,173.286 v1(204.851,173.286)
  Mid-Layer 1 w0.2: MEM1_ADDR.5@174.625,157.226 175.692,158.293 208.28,158.293 208.712,158.725 208.712,169.425 v1(204.851,173.286)
I_MEMORY.ADDR2_Data_mem2: MEM2_ADDR.5 MEMORY2.3 | length 26.7
  Top Layer w0.2: MEMORY2.3@109.994,173.159 v1(111.938,173.159)
  Mid-Layer 1 w0.2: v1(111.938,173.159) 111.938,171.628 121.463,162.103 121.463,159.529 121.895,159.097 126.966,159.097 MEM2_ADDR.5@128.016,160.147
I_MEMORY.ADDR3_Data_mem1: MEM1_ADDR.7 MEMORY1.2 | length 34.2
  Top Layer w0.2: v1(200.101,172.486) MEMORY1.2@203.72,172.486
  Bottom Layer w0.2: MEM1_ADDR.7@177.165,157.226 178.435,158.496 178.435,160.82 178.752,161.138 188.753,161.138 v1(200.101,172.486)
I_MEMORY.ADDR3_Data_mem2: MEM2_ADDR.7 MEMORY2.2 | length 20.5
  Top Layer w0.2: MEMORY2.2@109.994,172.359 v1(113.264,172.359)
  Mid-Layer 1 w0.2: v1(113.264,172.359) MEM2_ADDR.7@125.476,160.147
I_MEMORY.ADDR4_Data_mem1: MEM1_ADDR.9 MEMORY1.1 | length 36.4
  Top Layer w0.2: v1(202.157,171.686) MEMORY1.1@203.72,171.686
  Mid-Layer 2 w0.2: MEM1_ADDR.9@179.705,157.226 180.772,156.159 196.05,156.159 196.418,156.528 196.418,165.948 v1(202.157,171.686)
I_MEMORY.ADDR4_Data_mem2: MEM2_ADDR.9 MEMORY2.1 | length 18.6
  Top Layer w0.2: MEMORY2.1@109.994,171.559 v1(113.03,171.559)
  Mid-Layer 1 w0.2: v1(113.03,171.559) 122.936,161.653 MEM2_ADDR.9@122.936,160.147
I_MEMORY.ADDR5_Data_mem1: MEM1_ADDR.11 MEMORY1.44 | length 20.3
  Top Layer w0.2: MEMORY1.44@192.52,171.686 v1(193.65,171.686)
  Mid-Layer 2 w0.2: MEM1_ADDR.11@182.245,157.226 183.312,158.293 183.312,161.348 v1(193.65,171.686)
I_MEMORY.ADDR5_Data_mem2: MEM2_ADDR.11 MEMORY2.44 | length 26.3
  Top Layer w0.2: MEMORY2.44@98.794,171.559 v1(99.924,171.559)
  Mid-Layer 1 w0.2: v1(99.924,171.559) 108.984,171.559 MEM2_ADDR.11@120.396,160.147
I_MEMORY.ADDR6_Data_mem1: MEM1_ADDR.13 MEMORY1.43 | length 27
  Top Layer w0.2: MEM1_ADDR.13@184.785,157.226 185.928,156.083 193.04,156.083 193.878,156.921 193.878,161.722 194.158,162.001 194.158,172.085 193.757,172.486 MEMORY1.43@192.52,172.486
I_MEMORY.ADDR6_Data_mem2: MEM2_ADDR.13 MEMORY2.43 | length 28.7
  Top Layer w0.2: v1(97.663,168.453) 97.663,172.334 97.688,172.359 MEMORY2.43@98.794,172.359
  Mid-Layer 1 w0.2: v1(97.663,168.453) 103.886,162.23 115.773,162.23 MEM2_ADDR.13@117.856,160.147
I_MEMORY.ADDR7_Data_mem1: MEM1_ADDR.15 MEMORY1.42 | length 38.5
  Top Layer w0.2: MEM1_ADDR.15@187.325,157.226 186.258,158.293 184.15,158.293 183.718,157.861 183.718,155.575 184.048,155.245 195.072,155.245 196.012,156.185 196.012,170.797 193.522,173.286 MEMORY1.42@192.52,173.286
I_MEMORY.ADDR7_Data_mem2: MEM2_ADDR.15 MEMORY2.42 | length 21.9
  Top Layer w0.2: MEMORY2.42@98.794,173.159 99.916,173.159 v1(99.924,173.152)
  Bottom Layer w0.2: v1(99.924,173.152) 102.311,173.152 MEM2_ADDR.15@115.316,160.147
I_MEMORY.ADDR8_Data_mem1: MEM1_ADDR.17 MEMORY1.28 | length 31.3
  Top Layer w0.2: MEMORY1.28@192.52,184.486 v1(193.65,184.486)
  Mid-Layer 2 w0.2: MEM1_ADDR.17@189.865,157.226 188.798,158.293 188.798,164.694 194.158,170.053 194.158,183.978 v1(193.65,184.486)
I_MEMORY.ADDR8_Data_mem2: MEM2_ADDR.17 MEMORY2.28 | length 34.7
  Top Layer w0.2: MEMORY2.28@98.794,184.359 v1(106.75,184.359)
  Mid-Layer 2 w0.2: v1(106.75,184.359) 106.75,166.173 MEM2_ADDR.17@112.776,160.147
I_MEMORY.ADDR9_Data_mem1: MEM1_ADDR.19 MEMORY1.27 | length 31.7
  Top Layer w0.2: MEM1_ADDR.19@192.405,157.226 193.472,158.293 193.472,169.316 189.854,172.934 189.854,183.58 191.56,185.286 MEMORY1.27@192.52,185.286
I_MEMORY.ADDR9_Data_mem2: MEM2_ADDR.19 MEMORY2.27 | length 31.4
  Top Layer w0.2: v1(97.663,185.166) 97.67,185.159 MEMORY2.27@98.794,185.159
  Mid-Layer 2 w0.2: v1(97.663,185.166) 98.818,184.011 98.818,171.565 MEM2_ADDR.19@110.236,160.147
I_MEMORY.ADDR10_Data_mem1: MEM1_ADDR.21 MEMORY1.26 | length 31.2
  Top Layer w0.2: MEMORY1.26@192.52,186.086 193.327,186.086 v1(193.65,185.763)
  Mid-Layer 2 w0.2: v1(193.65,185.763) 196.012,183.401 196.012,158.293 MEM1_ADDR.21@194.945,157.226
I_MEMORY.ADDR10_Data_mem2: MEM2_ADDR.21 MEMORY2.26 | length 36.8
  Top Layer w0.2: MEMORY2.26@98.794,185.959 99.918,185.959 v1(99.924,185.953)
  Mid-Layer 2 w0.2: v1(99.924,185.953) 105.613,180.264 105.613,166.408 111.303,160.719 111.303,159.372 110.807,158.877 108.966,158.877 MEM2_ADDR.21@107.696,160.147
I_MEMORY.ADDR11_Data_mem1: MEM1_ADDR.23 MEMORY1.25 | length 48.5
  Top Layer w0.2: v1(191.389,186.893) 191.396,186.886 MEMORY1.25@192.52,186.886
  Mid-Layer 2 w0.2: v1(191.389,186.893) 200.025,186.893 200.343,186.576 200.343,177.991 203.632,174.702 203.632,156.489 203.2,156.058 198.653,156.058 MEM1_ADDR.23@197.485,157.226
I_MEMORY.ADDR11_Data_mem2: MEM2_ADDR.23 MEMORY2.25 | length 31.3
  Top Layer w0.2: v1(97.663,186.766) 97.67,186.759 MEMORY2.25@98.794,186.759
  Mid-Layer 2 w0.2: v1(97.663,186.766) 97.155,186.258 97.155,168.148 MEM2_ADDR.23@105.156,160.147
I_MEMORY.ADDR12_Data_mem1: MEM1_ADDR.25 MEMORY1.24 | length 56.3
  Top Layer w0.2: MEMORY1.24@192.52,187.686 189.662,187.686 183.312,181.336 183.312,154.711 183.363,154.661 197.46,154.661 MEM1_ADDR.25@200.025,157.226
I_MEMORY.ADDR12_Data_mem2: MEM2_ADDR.25 MEMORY2.24 | length 33.9
  Top Layer w0.2: MEMORY2.24@98.794,187.559 99.918,187.559 v1(99.924,187.554)
  Mid-Layer 2 w0.2: v1(99.924,187.554) 97.155,187.554 96.749,187.147 96.749,166.014 MEM2_ADDR.25@102.616,160.147
I_MEMORY.ADDR13_Data_mem1: MEM1_ADDR.27 MEMORY1.23 | length 43.5
  Top Layer w0.2: v1(190.881,188.486) MEMORY1.23@192.52,188.486
  Mid-Layer 2 w0.2: v1(190.881,188.486) 190.881,186.69 191.256,186.315 197.047,186.315 199.288,184.074 199.288,173.672 199.682,173.279 201.498,173.279 203.022,171.755 203.022,171.12 201.498,169.596 201.498,158.293 MEM1_ADDR.27@202.565,157.226
I_MEMORY.ADDR13_Data_mem2: MEM2_ADDR.27 MEMORY2.23 | length 31.4
  Top Layer w0.2: MEMORY2.23@98.794,188.359 97.148,188.359 96.749,187.96 96.749,163.474 MEM2_ADDR.27@100.076,160.147
I_MEMORY.ADDR14_Data_mem1: MEM1_ADDR.29 MEMORY1.22 | length 34.2
  Top Layer w0.2: MEMORY1.22@203.72,188.486 v1(206.172,188.486)
  Mid-Layer 2 w0.2: MEM1_ADDR.29@205.105,157.226 206.172,158.293 v1(206.172,188.486)
I_MEMORY.ADDR14_Data_mem2: MEM2_ADDR.29 MEMORY2.22 | length 41.9
  Top Layer w0.2: v1(108.864,188.366) 108.872,188.359 MEMORY2.22@109.994,188.359
  Mid-Layer 2 w0.2: MEM2_ADDR.29@97.536,160.147 96.342,161.341 96.342,187.642 96.787,188.087 108.585,188.087 v1(108.864,188.366)
I_MEMORY.ADDR15_Data_mem1: MEM1_ADDR.31 MEMORY1.21 | length 32.7
  Top Layer w0.2: MEMORY1.21@203.72,187.686 204.826,187.686 206.555,185.957 206.555,158.316 MEM1_ADDR.31@207.645,157.226
I_MEMORY.ADDR15_Data_mem2: MEM2_ADDR.31 MEMORY2.21 | length 47.3
  Top Layer w0.2: MEMORY2.21@109.994,187.559 110.807,187.559 111.125,187.876 v1(111.125,189.027)
  Mid-Layer 2 w0.2: MEM2_ADDR.31@94.996,160.147 94.996,188.747 95.275,189.027 v1(111.125,189.027)
I_MEMORY.ADDR16_Data_mem1: MEM1_ADDR.33 MEMORY1.20 | length 36.9
  Top Layer w0.2: MEMORY1.20@203.72,186.886 204.787,186.886 205.669,186.005 205.669,161.294 206.155,160.807 206.155,156.443 206.692,155.905 208.864,155.905 MEM1_ADDR.33@210.185,157.226
I_MEMORY.ADDR16_Data_mem2: MEM2_ADDR.33 MEMORY2.20 | length 38.8
  Top Layer w0.2: v1(108.864,186.766) 108.872,186.759 MEMORY2.20@109.994,186.759
  Bottom Layer w0.2: MEM2_ADDR.33@92.456,160.147 99.416,167.107 99.416,181.927 99.733,182.245 106.972,182.245 107.29,182.562 107.29,185.191 v1(108.864,186.766)
I_MEMORY.ADDR17_Data_mem1: MEM1_ADDR.35 MEMORY1.19 | length 44.3
  Top Layer w0.2: MEMORY1.19@203.72,186.086 202.641,186.086 202.616,186.111 202.616,189.052 202.641,189.078 207.569,189.078 208.813,187.833 208.813,158.915 209.232,158.496 211.455,158.496 MEM1_ADDR.35@212.725,157.226
I_MEMORY.ADDR17_Data_mem2: MEM2_ADDR.35 MEMORY2.19 | length 48.1
  Top Layer w0.2: MEM2_ADDR.35@89.916,160.147 89.916,175.108 v1(92.939,178.13) ; MEMORY2.19@109.994,185.959 v1(111.125,185.959)
  Mid-Layer 1 w0.2: v1(92.939,178.13) 94.132,179.324 112.395,179.324 113.124,180.053 113.124,183.96 v1(111.125,185.959)